# EAGLE board NMEA-v8.1-iso (EAGLE 6.4)
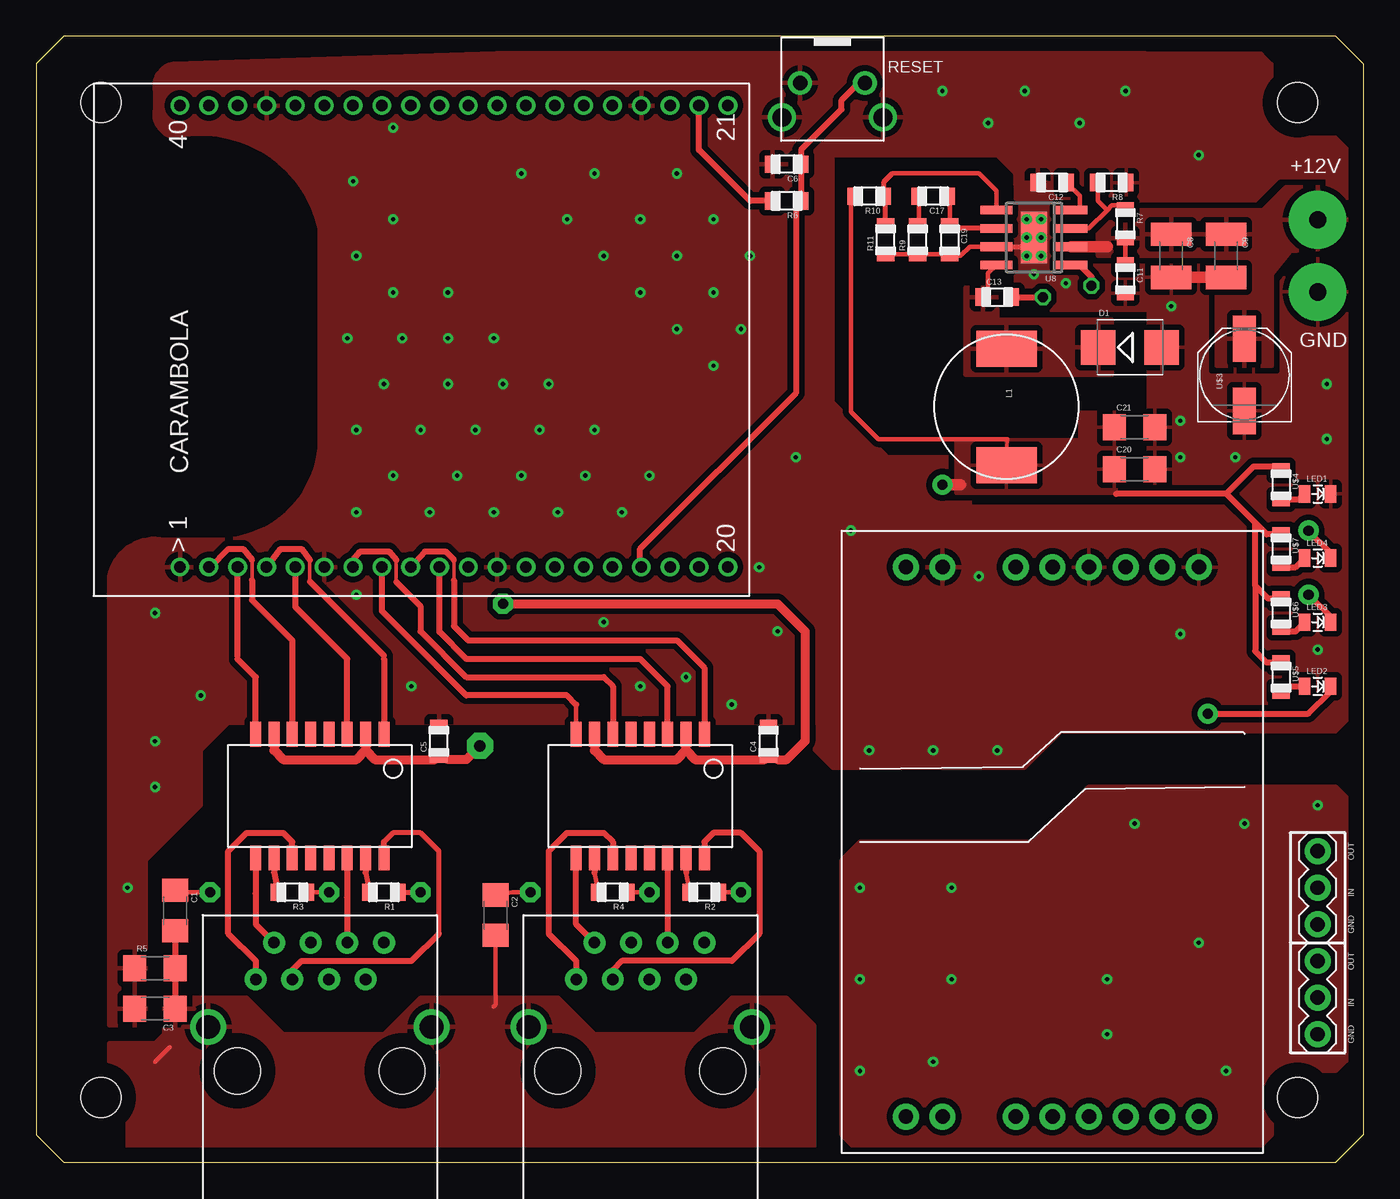
[diagram p0: board, top side]
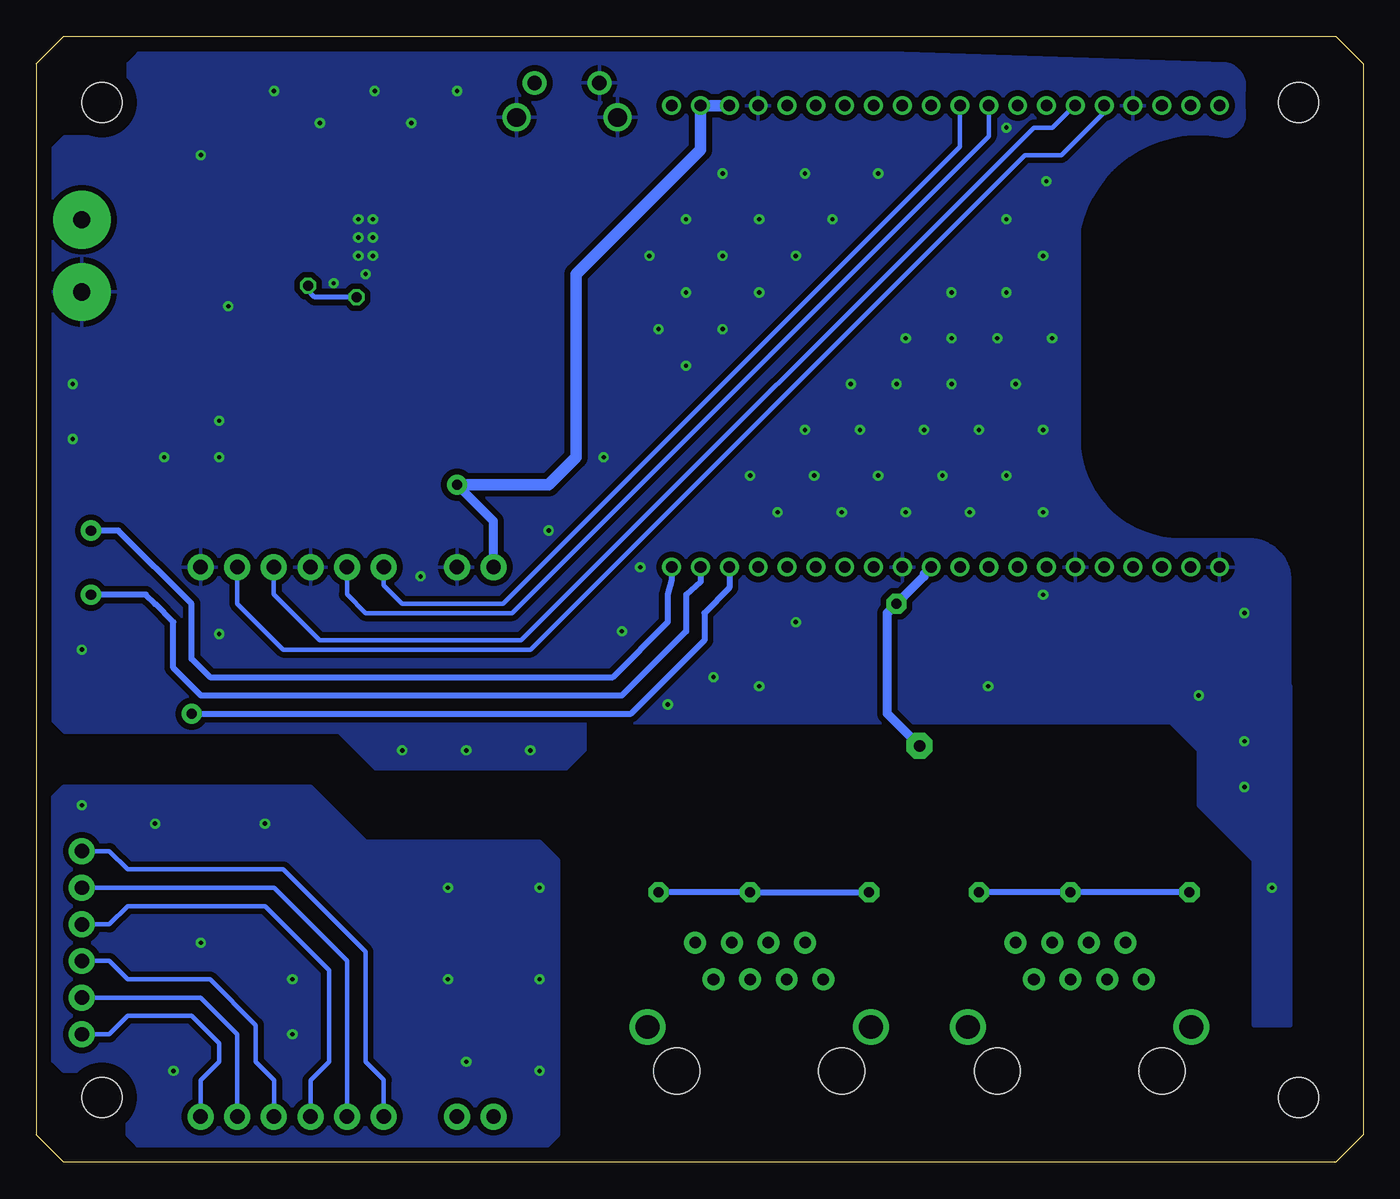
[diagram p1: board, bottom side, seen from below]

Size 92.08 x 78.11 mm. Coordinates in mm from the lower left corner, seen from the top.
Outline: 0,76.2 0,1.91 1.91,0 90.17,0 92.08,1.91 92.08,76.2 90.17,78.11 1.91,78.11 0,76.2
Copper layers (1*16): Top 0.035mm / dielectric 1.5mm / Bottom 0.035mm
Design rules "default *": minimum track width 8mil, minimum drill 10mil, track to track 8mil, track to pad 8mil, pad to pad 8mil, via to via 8mil, smd to smd 8mil, copper to edge 40mil, drill to drill 8mil, minimum pad ring 10mil, minimum via ring 8mil, stop-mask expansion 4mil, vias tented up to drill 0.35mm, thermal gap 16mil
Holes 2.8 mm at 4.5,73.5 87.5,73.5 87.5,4.5 4.5,4.5

## Footprints (pad centres in the part's own frame; a part is rotated, then mirrored left to right if it is on the bottom)
1206 = smd 1.6 x 1.8: 1 -1.4,0.127; 2 1.4,0.127
0805 = smd 1 x 1.2: 1 -1,0; 2 1,0
1210 = smd 1.6 x 2.8: 1 -1.5,0; 2 1.5,0
CARAMBOLA = drill 0.8: 1 -16,19; 2 -16,17; 3 -16,15; 4 -16,13; 5 -16,11; 6 -16,9; 7 -16,7; 8 -16,5; 9 -16,3; 10 -16,1; 11 -16,-1; 12 -16,-3; 13 -16,-5; 14 -16,-7; 15 -16,-9; 16 -16,-11; 17 -16,-13; 18 -16,-15; 19 -16,-17; 20 -16,-19; 21 16,-19; 22 16,-17; 23 16,-15; 24 16,-13; 25 16,-11; 26 16,-9; 27 16,-7; 28 16,-5; 29 16,-3; 30 16,-1; 31 16,1; 32 16,3; 33 16,5; 34 16,7; 35 16,9; 36 16,11; 37 16,13; 38 16,15; 39 16,17; 40 16,19
SMB = smd 2.4 x 2.4: A 2.2,0; C -2.2,0
CON-3 = drill 1 pad 1.8: 1 0,2.54; 2 0,0; 3 0,-2.54
H/HX1XXXNL = smd 0.762 x 1.714: 1 -5.08,-4.286; 2 -3.81,-4.286; 3 -2.54,-4.286; 4 -1.27,-4.286; 5 0,-4.286; 6 1.27,-4.286; 7 2.54,-4.286; 8 3.81,-4.286; 9 3.81,4.286; 10 2.54,4.286; 11 1.27,4.286; 12 0,4.286; 13 -1.27,4.286; 14 -2.54,4.286; 15 -3.81,4.286; 16 -5.08,4.286
CON--5MM-2 = drill 1.2 pad 4: 1 0,2.5; 2 0,-2.5
CLF10040 = smd 2.5 x 4.2: P$1 -4.05,0; P$2 4.05,0
L0805 = smd 0.8 x 1.2: A -0.9,0; C 0.9,0
SOIC-THERMAL = smd 0.6 x 2.2: 1 -1.905,-2.6; 2 -0.635,-2.6; 3 0.635,-2.6; 4 1.905,-2.6; 5 1.905,2.6; 6 0.635,2.6; 7 -0.635,2.6; 8 -1.905,2.6 | smd 3.556 x 1.778: P$1 0,0
ISO-BOARD = drill 1 pad 1.8: 3V3 -10.16,19.05; GND -7.62,19.05; GNDO1 2.54,19.05; GNDO2 10.16,19.05; ISO3V3 -10.16,-19.05; ISOGND -7.62,-19.05; ISOGND1 2.54,-19.05; ISOGND2 10.16,-19.05; RIN1 0,-19.05; RIN2 7.62,-19.05; RXO1 0,19.05; RXO2 7.62,19.05; TIN1 -2.54,-19.05; TIN2 5.08,-19.05; TXO1 -2.54,19.05; TXO2 5.08,19.05
TACTILE-SWITCH-FSMRA1J = drill 0.99 pad 1.651: 1 -2.248,-1.194; 2 2.248,-1.194 | drill 1.3: SHIELD1 -3.505,1.194; SHIELD2 3.505,1.194
PANASONIC_D = smd 3.2 x 1.6: + 2.5,0; - -2.5,0
RJ45-STEWART-6488 = drill 0.8 pad 1.524: 1 -4.445,6.35; 2 -3.175,8.89; 3 -1.905,6.35; 4 -0.635,8.89; 5 0.635,6.35; 6 1.905,8.89; 7 3.175,6.35; 8 4.445,8.89 | drill 1.651: SH1 -7.747,3.048; SH2 7.747,3.048 | hole 3.175: -5.715,0; 5.715,0

## Placement (x,y rotation side)
C1  1000pF 2kV  [1206]  9.53,17.46 270 top
C2  1000pF 2kV  [1206]  31.75,17.14 270 top
C3  1000pF 2kV  [1206]  8.26,10.79 180 top
C4  0.1uF 16V  [0805]  50.8,29.21 90 top
C5  0.1uF 16V  [0805]  27.94,29.21 90 top
C6  0.1uF  [0805]  52.07,69.22 180 top
C8  4.7uF  [1210]  78.74,62.87 270 top
C9  4.7uF  [1210]  82.55,62.87 270 top
C11  0.01uF  [0805]  75.56,61.28 270 top
C12  0.015uF  [0805]  70.48,67.94 180 top
C13  0.1uF  [0805]  66.67,60.01 0 top
C17  1000pF  [0805]  62.23,66.99 180 top
C19  47pF  [0805]  63.37,63.98 270 top
C20  47uF  [1206]  76.2,47.94 0 top
C21  47uF  [1206]  76.2,50.85 0 top
CARAMBOLA  CARAMBOLA  [CARAMBOLA]  28.98,57.28 90 top
D1  B240F  [SMB]  75.88,56.52 0 top
DATA1  CON-3  [CON-3]  88.9,19.05 0 top
DATA2  CON-3  [CON-3]  88.9,11.43 0 top
FX1  H1102NLT  [H/HX1XXXNL]  19.05,25.4 180 top
FX2  H1102NLT  [H/HX1XXXNL]  41.27,25.4 180 top
J1  CON-5MM-2  [CON--5MM-2]  88.9,62.87 0 top
L1  CLF_TDK_INDUCTORCLF10040  [CLF10040]  67.31,52.39 270 top
LED1  LED0805  [L0805]  88.9,46.35 0 top
LED2  LED0805  [L0805]  88.9,33.02 0 top
LED3  LED0805  [L0805]  88.9,37.47 0 top
LED4  LED0805  [L0805]  88.9,41.91 0 top
R1  75  [0805]  24.13,18.73 180 top
R2  75  [0805]  46.35,18.73 180 top
R3  75  [0805]  17.78,18.73 180 top
R4  75  [0805]  40.01,18.73 180 top
R5  100k  [1206]  8.26,13.34 0 top
R6  10k  [0805]  52.07,66.67 180 top
R7  332k  [0805]  75.56,65.09 270 top
R8  68.1k  [0805]  74.61,67.94 180 top
R9  29.4k  [0805]  61.15,63.98 90 top
R10  10.2k  [0805]  57.78,66.99 180 top
R11  3.24k  [0805]  58.93,63.98 90 top
U8  TPS54231  [SOIC-THERMAL]  69.22,64.14 90 top
U$1  ISO-BOARDV1  [ISO-BOARD]  70.5,22.23 0 top
U$2  TACTILE-SWITCH-FSMRA1J  [TACTILE-SWITCH-FSMRA1J]  55.24,73.66 180 top
U$3  PANASONIC-ALUD  [PANASONIC_D]  83.82,54.61 90 top
U$4  RES0805  [0805]  86.36,46.99 270 top
U$5  RES0805  [0805]  86.36,33.66 270 top
U$6  RES0805  [0805]  86.36,38.1 270 top
U$7  RES0805  [0805]  86.36,42.55 270 top
X1  RJ45-STEWART-SS-6488SA-NF  [RJ45-STEWART-6488]  19.68,6.35 0 top
X2  RJ45-STEWART-SS-6488SA-NF  [RJ45-STEWART-6488]  41.91,6.35 0 top

## Library data of the parts
C1-C6 C8 C9 C11-C13 C17 C19-C21 R1-R11 U$3-U$7 = __bo_caps
CARAMBOLA D1 DATA1 DATA2 FX1 FX2 J1 L1 LED1-LED4 U8 U$1 U$2 X1 X2 = __my

## Nets
2VD: C4.1 C5.1 CARAMBOLA.11 FX1.2 FX1.7 FX2.2 FX2.7
3V3: C20.1 C21.1 CARAMBOLA.22 CARAMBOLA.23 L1.P$2 R6.2 R10.2 U$1.3V3 U$4.1 U$5.1 U$6.1 U$7.1
EN: R7.1 R8.2 U8.3
ETH1_RD: CARAMBOLA.8 FX2.8
GND: C3.2 C4.2 C5.2 C6.2 C8.2 C9.2 C11.2 C12.2 C19.2 C20.2 C21.2 CARAMBOLA.1 CARAMBOLA.6 CARAMBOLA.12 CARAMBOLA.24 CARAMBOLA.37 D1.A J1.2 LED1.C R5.1 R8.1 R9.1 R11.1 U8.7 U8.P$1 U$1.GND U$1.GNDO1 U$1.GNDO2 U$2.2 U$2.SHIELD1 U$2.SHIELD2 U$3.-
GNDA: C1.2 C2.2 C3.1 R5.2 X1.SH1 X1.SH2 X2.SH1 X2.SH2
ISOGND1: DATA1.3 U$1.ISOGND1
ISOGND2: DATA2.3 U$1.ISOGND2
LED1: CARAMBOLA.18 LED2.C
LED2: CARAMBOLA.19 LED3.C
LED3: CARAMBOLA.20 LED4.C
N$1: CARAMBOLA.4 FX1.1
N$2: C13.2 U8.1
N$3: LED1.A U$4.2
N$4: LED2.A U$5.2
N$5: LED3.A U$6.2
N$6: R10.1 R11.2 U8.5
N$7: C17.1 C19.1 U8.6
N$8: C17.2 R9.2
N$9: LED4.A U$7.2
N$11: CARAMBOLA.2 FX1.6
N$13: CARAMBOLA.5 FX1.3
N$16: CARAMBOLA.3 FX1.8
N$17: C2.1 R2.1 R4.1
N$20: FX1.10 R3.2
N$21: FX1.15 R1.2
N$22: C1.1 R1.1 R3.1
N$23: FX1.11 X1.1
N$24: FX1.9 X1.2
N$25: FX1.16 X1.3
N$26: FX1.14 X1.6
N$27: CARAMBOLA.7 FX2.6
N$28: CARAMBOLA.9 FX2.1
N$30: CARAMBOLA.10 FX2.3
N$31: FX2.15 R2.2
N$32: FX2.10 R4.2
N$33: FX2.16 X2.3
N$34: FX2.11 X2.1
N$35: FX2.14 X2.6
N$36: FX2.9 X2.2
PH: C13.1 D1.C L1.P$1 U8.8
RESET: C6.1 CARAMBOLA.17 R6.1 U$2.1
RIN1: DATA1.2 U$1.RIN1
RIN2: DATA2.2 U$1.RIN2
RXIN1: CARAMBOLA.36 U$1.RXO2
RXIN2: CARAMBOLA.32 U$1.RXO1
SS: C12.1 U8.4
TIN1: DATA1.1 U$1.TIN1
TIN2: DATA2.1 U$1.TIN2
TXO1: CARAMBOLA.35 U$1.TXO2
TXO2: CARAMBOLA.31 U$1.TXO1
VIN: C8.1 C9.1 C11.1 J1.1 R7.2 U8.2 U$3.+

## Tracks (layer width: path | path; a pad name or v marks a point on that pad's centre or on a via)
2VD  (via drill 0.7 pad 1.4, 0.8 pad 1.78)
  Top 0.305: 28.57,27.94 C5.1 | 51.44,27.94 C4.1 | FX2.2 45.09,29.21
  Top 0.356: FX2.7 38.73,29.21 | 28.16,28.57 C5.1
  Top 0.61: v32.38,38.73 51.44,38.73 53.34,36.83 53.34,29.21 52.07,27.94 51.44,27.94 | 28.57,27.94 29.84,27.94 v30.8,28.89 | 45.09,28.57 FX2.2 | 38.73,29.21 38.73,28.57 39.37,27.94 44.45,27.94 45.09,28.57 | 45.09,28.57 45.72,27.94 50.53,27.94 C4.1 | FX1.7 16.51,28.57 17.14,27.94 22.23,27.94 22.86,28.57 | FX1.2 22.86,28.57 | 22.86,28.57 23.5,27.94 27.67,27.94 C5.1
  Bottom 0.61: v30.8,28.89 33.02,31.11 33.02,38.1 v32.38,38.73 30.48,40.64 30.48,40.79 CARAMBOLA.11
3V3  (via drill 0.7 pad 1.4)
  Top 0.254: 67.39,50.16 67.31,48.9 | 67.31,48.9 67.31,49.53 | 67.31,48.9 L1.P$2
  Top 0.305: 67.39,50.16 58.42,50.16 56.52,52.07 56.52,67.31 56.78,67.04 R10.2 56.78,66.63
  Top 0.406: 85.94,39.37 U$6.1 85.47,39.1 84.56,40.01 | U$4.1 86.09,48.26 84.45,48.26 82.55,46.35 | R6.2 49.53,66.67 45.98,70.22 CARAMBOLA.22 | 82.55,46.35 74.93,46.35 | U$7.1 85.36,43.55 84.56,44.34 | U$5.1 85.36,34.66 84.56,35.45 84.56,40.01 | 84.56,44.34 82.55,46.35 | 84.56,40.01 84.56,44.34
  Top 0.813: 64.14,46.99 v62.87,46.99
  Bottom 0.61: U$1.3V3 60.34,44.47 v62.87,46.99
  Bottom 0.813: CARAMBOLA.23 CARAMBOLA.22 45.98,70.22 54.61,61.59 54.61,48.9 56.52,46.99 v62.87,46.99
  pour Top (isolate 0.406): 74.93,46.35 63.82,46.35 63.82,50.16 72.39,50.16 72.39,52.07 74.93,52.07
EN
  Top 0.305: U8.3 73.03,64.77 74.3,66.04 | 74.3,66.04 73.66,66.67 73.66,67.9 R8.2 | 74.3,66.04 74.61,66.36 75.3,66.36 R7.1
ETH1_RD
  Top 0.305: 37.47,31.75 FX2.8
  Top 0.406: 37.47,31.75 36.83,32.38 29.84,32.38 23.98,38.24 CARAMBOLA.8
GND  (via drill 0.3)
  Top 0.305: U8.7 64.77,63.5 64.14,62.87 63.95,62.87 C19.2 R9.1 R11.1
  Top 0.356: U8.7 69.22,63.5 U8.P$1
  Top 0.813: C8.2 C9.2
  other vias: 89.53,50.16 52.7,48.9 8.26,29.21 24.13,53.98 51.44,36.83 8.26,26.04 50.16,41.27 79.38,36.64 56.52,43.81 57.78,28.57 26.04,33.02 22.23,39.37 62.87,74.3 68.58,74.3 75.56,74.3 79.38,51.44 89.53,53.98 83.19,48.9 28.57,53.98 32.38,53.98 35.56,53.98 26.67,50.8 30.48,50.8 34.92,50.8 38.73,50.8 25.4,57.15 28.57,57.15 28.57,60.33 24.77,60.33 24.77,65.41 22.23,62.87 21.59,57.15 22.23,50.8 24.77,47.62 29.21,47.62 33.66,47.62 38.1,47.62 36.83,65.41 41.91,65.41 46.99,65.41 39.37,62.87 44.45,62.87 49.53,62.87 33.66,68.58 38.73,68.58 44.45,68.58 68.71,65.41 69.72,65.41 68.71,64.14 68.71,62.87 69.72,64.14 69.72,62.87 31.75,57.15 41.91,60.33 46.99,60.33 44.45,57.78 48.9,57.78 46.99,55.24 22.23,45.09 27.3,45.09 31.75,45.09 36.2,45.09 40.64,45.09 42.55,47.62 6.35,19.05 8.26,38.1 11.43,32.38 79.38,48.9 65.41,40.64 66.67,28.57 21.99,68.04 24.77,71.75 62.23,28.57 88.9,35.56 39.37,37.47 48.26,31.75 45.09,33.66 41.91,33.02 80.64,69.85 66.04,72.07 72.39,72.07 69.22,61.59 71.44,60.96 78.74,59.37
  pour Top (isolate 0.406): 70.04,67.78 70.04,69.85 74.93,69.85 76.83,71.75 76.83,77.47 55.24,77.47 55.24,69.85 66.67,69.85 67.94,68.58 67.94,67.78
  pour Top (isolate 0.406, rank 2): 67.94,77.47 84.45,77.47 85.72,76.2 85.72,72.39 87,71.12 90.17,71.12 91.44,69.85 91.44,44.22 77.15,44.22 77.15,59.05 67.94,59.05
  pour Top (isolate 0.61): 5.71,40.01 5.71,31.75 51.44,31.75 51.44,40.01
  pour Bottom (isolate 0.406): 5.08,30.48 5.08,40.01 arc-90 7.62,43.18 12.7,43.18 arc90 19.68,50.16 19.68,64.77 arc90 9.53,71.12 arc-90 8.26,73.03 8.26,74.3 arc-90 9.53,76.2 48.9,77.47 84.45,77.47 85.72,76.2 85.72,72.39 87,71.12 90.17,71.12 91.44,69.85 91.44,31.11 90.17,29.84 71.12,29.84 68.58,27.3 55.24,27.3 53.98,28.57 53.98,30.48
  pour Bottom (isolate 0.61): 5.08,33.02 5.08,9.53 7.62,9.53 7.62,20.95 11.43,24.77 11.43,28.57 13.34,30.48 13.34,33.02
  pour Top (isolate 0.406, rank 2): 9.53,76.2 48.9,77.47 55.24,77.47 55.24,52.7 59.05,48.9 64.77,48.9 64.77,30.48 13.34,30.48 11.43,28.57 11.43,24.77 7.62,20.95 7.62,9.53 5.08,9.53 5.08,40.64 arc-90 8.89,43.18 12.7,43.18 arc90 19.68,50.16 19.68,64.77 arc90 9.53,71.12 arc-90 8.26,73.03 8.26,74.3 arc-90
  pour Top (isolate 0.406, rank 2): 91.44,45.53 91.44,31.11 90.17,29.84 71.12,29.84 68.58,27.3 55.24,27.3 53.98,28.57 53.98,45.53
  pour Top (isolate 0.406, no thermals): 67.94,67.94 67.94,60.96 70.48,60.96 70.48,67.94
GNDA
  Top 0.305: 9.26,7.99 8.26,6.99 | 31.75,10.79 31.88,10.92 C2.2
  Top 0.406: 9.53,10.79 C3.1 R5.2 C1.2
  pour Top (isolate 0.305, rank 3): 8.89,11.43 14.61,11.43 17.14,8.89 24.13,8.89 26.67,11.43 36.2,11.43 38.73,8.89 45.72,8.89 48.26,11.43 52.07,11.43 53.98,9.53 53.98,0.64 6.35,0.64 6.35,5.71 5.08,6.99 5.08,8.26 8.26,8.26 8.89,8.89
ISOGND  (via drill 0.3)
  other vias: 57.15,19.05 63.5,19.05 88.9,24.77 63.5,12.7 57.15,12.7 57.15,6.35 62.23,6.99 74.3,8.89 74.3,12.7 80.64,15.24 83.82,23.5 76.2,23.5 82.55,6.35
  pour Top (isolate 0.406): 55.88,20.95 57.15,22.23 69.22,22.23 73.03,26.04 90.17,26.04 91.44,24.77 91.44,7.62 90.17,6.35 87,6.35 85.72,5.08 85.72,1.91 84.45,0.64 57.15,0.64 55.88,1.91
  pour Bottom (isolate 0.406): 55.88,1.91 57.15,0.64 84.45,0.64 85.72,1.91 85.72,5.08 87,6.35 90.17,6.35 91.44,7.62 91.44,24.77 90.17,26.04 73.03,26.04 69.22,22.23 57.15,22.23 55.88,20.95
ISOGND1
  Bottom 0.305: DATA1.3 87,16.51 85.72,17.78 76.2,17.78 71.75,13.34 71.75,6.99 73.04,5.7 U$1.ISOGND1
ISOGND2
  Bottom 0.305: DATA2.3 87,8.89 85.72,10.16 81.28,10.16 79.38,8.26 79.38,6.99 80.66,5.7 U$1.ISOGND2
LED1  (via drill 0.7 pad 1.4)
  Top 0.305: 89.8,32.65 LED2.C
  Top 0.406: v81.28,31.11 88.27,31.11 89.8,32.65
  Bottom 0.406: v81.28,31.11 50.8,31.11 45.72,36.2 45.72,38.1 43.98,39.84 CARAMBOLA.18
LED2  (via drill 0.7 pad 1.4)
  Top 0.305: 89.8,37.2 LED3.C 89.8,37.84
  Top 0.406: v88.27,39.37 89.8,37.84
  Bottom 0.406: CARAMBOLA.19 45.98,40.27 46.99,39.37 46.99,36.83 51.44,32.38 80.64,32.38 82.55,34.29 82.55,37.47 83.82,38.73 84.45,39.37 v88.27,39.37
LED3  (via drill 0.7 pad 1.4)
  Top 0.305: 89.8,41.65 LED4.C
  Top 0.406: LED4.C 89.8,42.28 v88.27,43.81
  Bottom 0.406: CARAMBOLA.20 47.98,40.37 48.26,39.37 48.26,37.47 52.07,33.66 80.01,33.66 81.28,34.92 81.28,38.73 86.36,43.81 v88.27,43.81
N$1
  Top 0.254: 18.98,41.78 18.98,40.28
  Top 0.305: 24.13,34.92 24.13,35.14
  Top 0.406: 24.13,34.92 FX1.1 | CARAMBOLA.4 16.97,42.55 18.41,42.55 18.98,41.78 | 24.13,35.14 18.98,40.28
N$2  (via drill 0.7)
  Top 0.305: 72.39,62.23 U8.1
  Top 0.406: C13.2 v69.85,60.01 | v73.22,60.8 73.22,61.41 72.39,62.23
  Bottom 0.356: v73.22,60.8 73.22,60.48 72.74,60.01 v69.85,60.01
N$3
  Top 0.406: U$4.2 87.64,45.99 LED1.A
N$4
  Top 0.406: U$5.2 86.58,33.02 LED2.A
N$5
  Top 0.406: U$6.2 86.58,36.83 87.36,36.83 LED3.A
N$6
  Top 0.305: U8.5 66.61,67.37 65.41,68.58 59.41,68.58
  Top 0.356: R11.2 58.93,66.94 R10.1 58.83,68 59.41,68.58
N$7
  Top 0.305: C17.1 63.37,66.73 C19.1
  Top 0.356: U8.6 63.11,64.77 C19.1
N$8
  Top 0.305: C17.2 61.23,65.06 R9.2
N$9
  Top 0.406: U$7.2 86.36,41.27 87.36,41.27 LED4.A
N$11
  Top 0.254: 14.98,41.78 14.98,40.39
  Top 0.305: CARAMBOLA.2 12.05,41.28 12.06,41.27
  Top 0.406: 12.06,41.27 13.34,42.55 14.35,42.55 14.98,41.78 | 14.98,40.39 14.98,38.99 17.78,36.2 FX1.6
N$13
  Top 0.406: CARAMBOLA.5 17.98,38.53 21.59,34.92 FX1.3
N$16
  Top 0.305: 13.98,35.11 13.98,34.91
  Top 0.406: FX1.8 15.24,33.66 13.98,34.91 | 13.98,35.11 CARAMBOLA.3
N$17  (via drill 0.7 pad 1.4)
  Top 0.305: v34.29,18.73 33.02,18.73 C2.1 | v42.55,18.73 R4.1 | v48.9,18.73 R2.1
  Bottom 0.406: v34.29,18.73 v42.55,18.73 v48.9,18.73
N$20
  Top 0.406: FX1.10 16.51,20.11 R3.2
N$21
  Top 0.356: 22.86,20.11 R1.2
  Top 0.406: FX1.15 22.86,20.11
N$22  (via drill 0.7 pad 1.4)
  Top 0.305: R3.1 v20.32,18.73 | v12.06,18.73 9.52,18.73 C1.1
  Top 0.356: R1.1 v26.67,18.73
  Bottom 0.406: v26.67,18.73 v20.32,18.73 v12.06,18.73
N$23
  Top 0.406: FX1.11 17.78,22.23 17.14,22.86 14.61,22.86 13.34,21.59 13.34,15.88 15.24,13.97 X1.1
N$24
  Top 0.406: FX1.9 15.23,18.65 15.24,18.41 15.24,16.51 X1.2
N$25
  Top 0.356: 24.13,22.23 24.77,22.86 26.67,22.86 27.94,21.59 27.94,15.88
  Top 0.406: FX1.16 24.13,22.23 | X1.3 17.78,13.34 18.41,13.97 26.04,13.97 27.94,15.88
N$26
  Top 0.406: FX1.14 21.58,18.37 21.59,18.41 X1.6
N$27
  Top 0.254: 24.98,41.78 24.98,40.26
  Top 0.406: FX2.6 40.01,33.02 39.37,33.66 29.84,33.66 26.67,36.83 26.67,38.57 24.98,40.26 | CARAMBOLA.7 21.98,41.78 22.48,42.37 24.48,42.37 24.98,41.78
N$28
  Top 0.254: 28.98,41.78 28.98,40.37
  Top 0.406: CARAMBOLA.9 26.98,42.37 28.4,42.37 28.98,41.78 | FX2.1 46.35,34.29 44.45,36.2 29.98,36.2 28.98,37.19 28.98,40.37
N$30
  Top 0.406: FX2.3 43.81,33.02 41.91,34.92 29.84,34.92 27.98,36.78 CARAMBOLA.10
N$31
  Top 0.305: 45.09,20.11 R2.2
  Top 0.406: FX2.15 45.09,20.11
N$32
  Top 0.305: 38.73,20.11 R4.2
  Top 0.406: FX2.10 38.73,20.11
N$33
  Top 0.406: FX2.16 46.35,22.23 46.99,22.86 48.9,22.86 50.16,21.59 50.16,15.88 48.26,13.97 40.64,13.97 40.01,13.34 X2.3
N$34
  Top 0.406: FX2.11 40.01,22.23 39.37,22.86 36.83,22.86 35.56,21.59 35.56,15.88 37.47,13.97 X2.1
N$35
  Top 0.406: FX2.14 X2.6
N$36
  Top 0.406: FX2.9 37.47,16.51 X2.2
PH
  Top 0.305: 67.59,56.52 L1.P$1 | U8.8 66.04,61.66 66.04,60.01 C13.1
  pour Top (isolate 0.406): 66.67,60.64 66.67,58.42 74.61,58.42 74.61,54.61 64.45,54.61 64.45,60.64
RESET
  Top 0.406: CARAMBOLA.17 41.91,41.36 41.91,42.55 52.7,53.34 52.7,66.41 R6.1 C6.1 53.07,70.22 55.88,73.03 55.88,73.66 57.07,74.85 U$2.1
RIN1
  Bottom 0.305: DATA1.2 75.56,19.05 70.5,13.98 U$1.RIN1
RIN2
  Bottom 0.305: U$1.RIN2 78.12,8.9 80.64,11.43 DATA2.2
RXIN1
  Bottom 0.305: U$1.RXO2 78.12,38.75 74.93,35.56 57.78,35.56 23.5,69.85 20.95,69.85 17.98,72.82 CARAMBOLA.36
RXIN2
  Bottom 0.305: U$1.RXO1 70.5,39.38 69.22,38.1 59.05,38.1 25.98,71.17 CARAMBOLA.32
SS
  Top 0.305: U8.4 72.39,66.04 72.39,67.04 C12.1
TIN1
  Bottom 0.305: DATA1.1 87,21.59 85.72,20.32 74.93,20.32 69.22,14.61 69.22,6.99 67.96,5.73 U$1.TIN1
TIN2
  Bottom 0.305: DATA2.1 87,13.97 85.72,12.7 80.01,12.7 76.83,9.53 76.83,6.99 75.56,5.71 75.56,3.19 U$1.TIN2
TXO1
  Bottom 0.305: 20.06,73.28 21.59,71.75 22.86,71.75 58.42,36.2 72.39,36.2 75.58,39.38 U$1.TXO2
  Bottom 0.406: CARAMBOLA.35 20.06,73.28
TXO2
  Bottom 0.305: U$1.TXO1 67.96,40.02 66.67,38.73 59.69,38.73 27.98,70.44 CARAMBOLA.31
VIN
  Top 0.305: C11.1 R7.2
  Top 0.813: U8.2 74.3,63.5
  pour Top (isolate 0.406): 73.66,62.87 73.66,66.04 85.09,66.04 86.68,67.63 91.44,67.63 91.44,63.5 87,63.18 85.72,61.59 85.72,55.24 81.92,55.24 81.92,62.87

## Text on the board
tPlace: RESET | +12V | GND | OUT | IN | GND | OUT | IN | GND
DrillLegend_01-16: 01-16
DrillLegend_01-20: 01-20